# EAGLE board Boost_v3 (EAGLE 8.6.3)
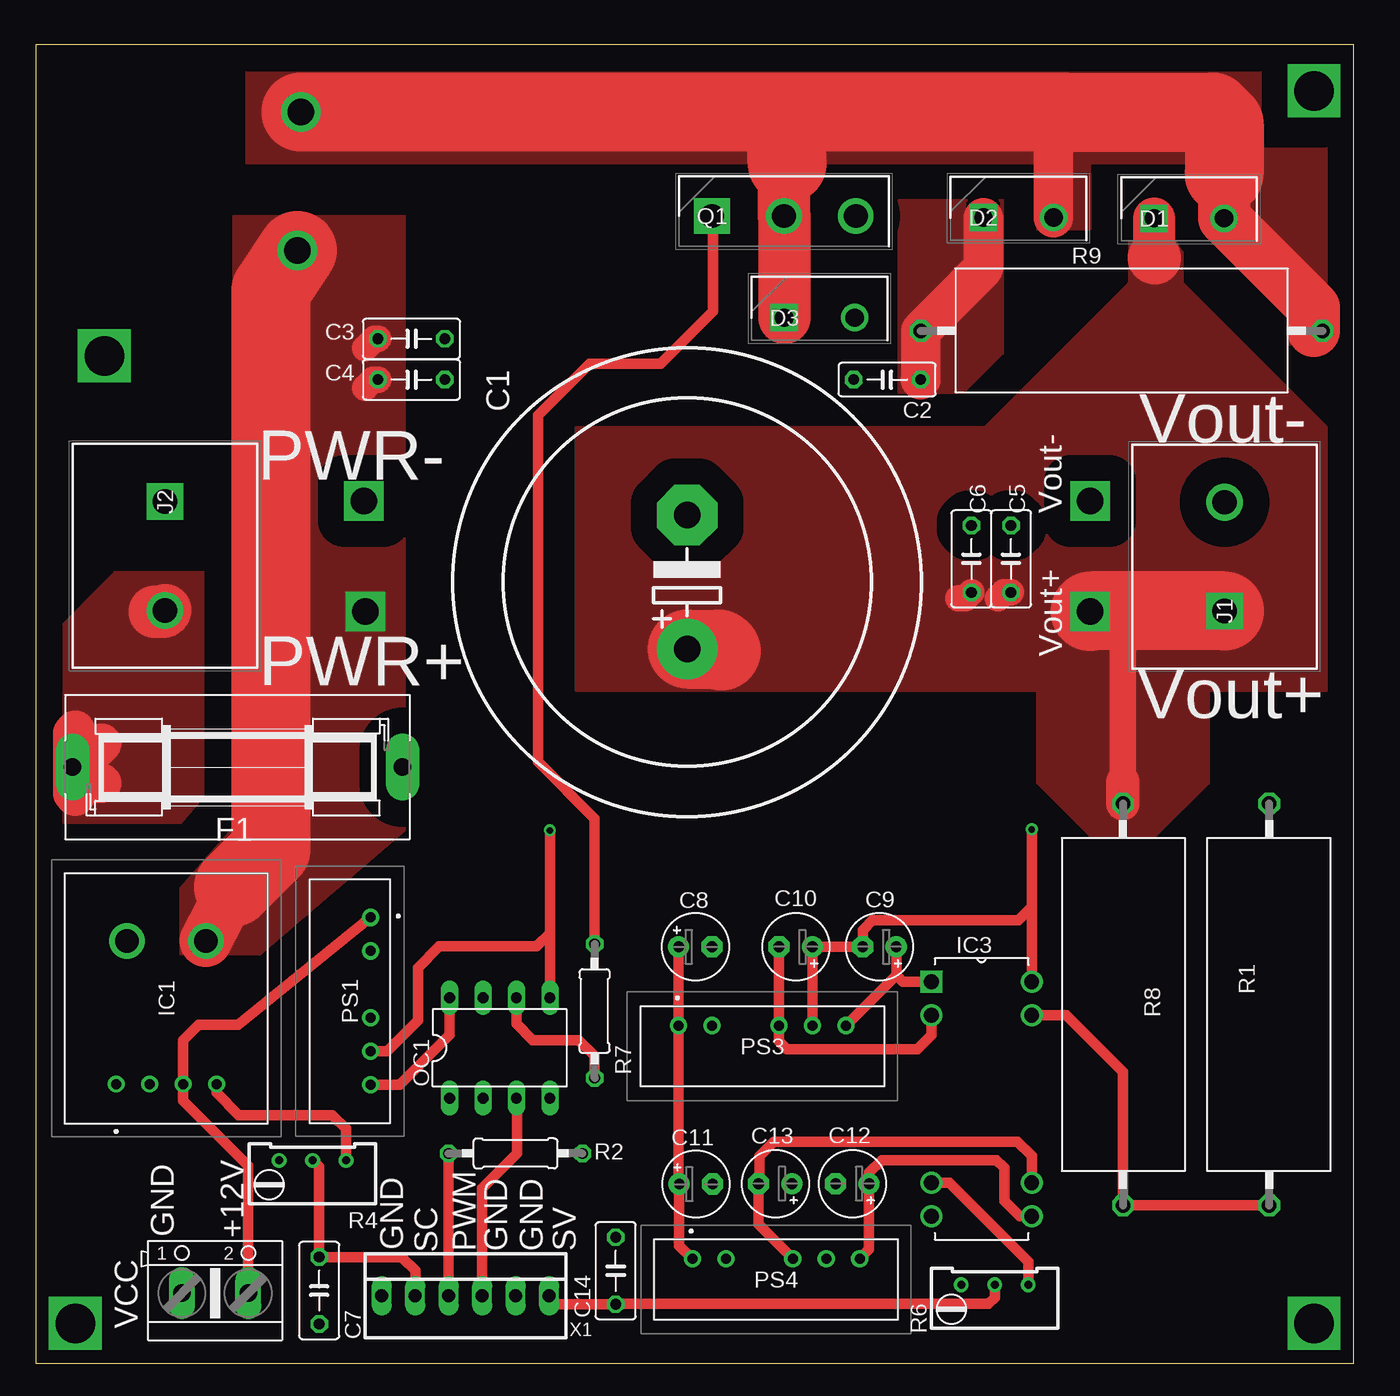
[diagram p0: board, top side]
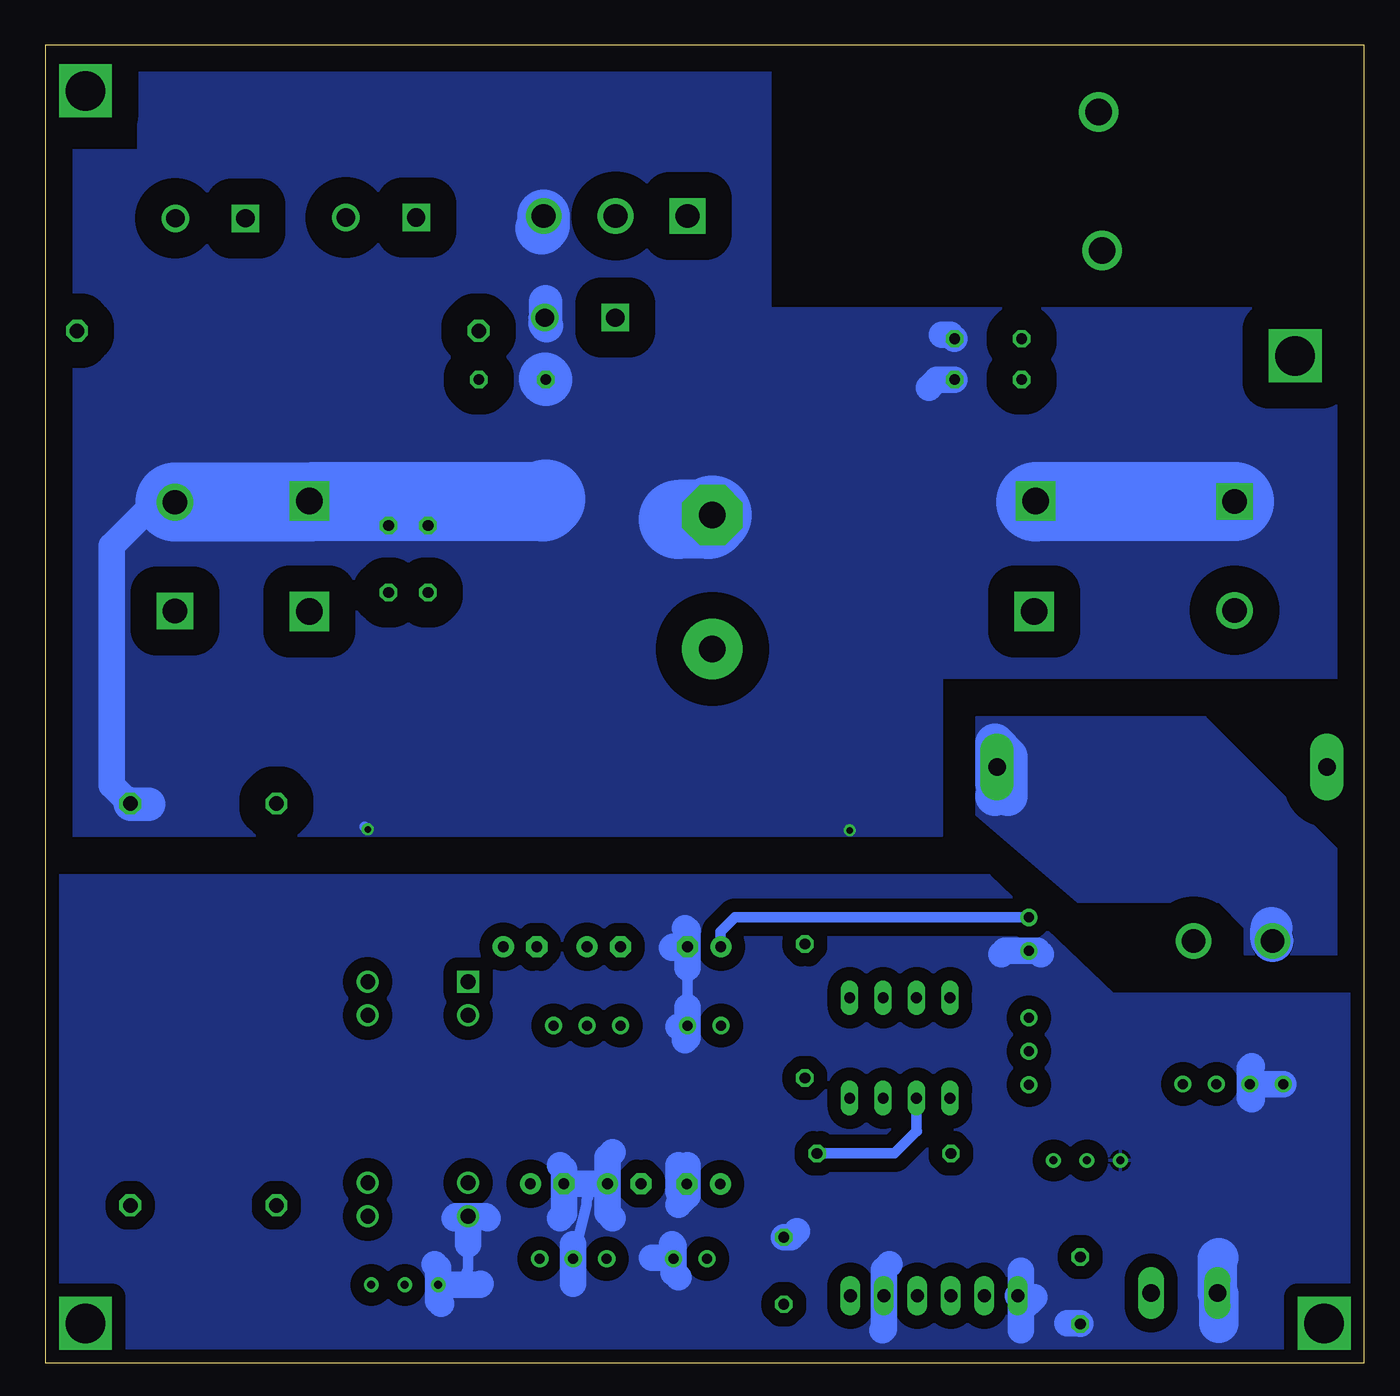
[diagram p1: board, bottom side, seen from below]

Size 100 x 100 mm. Coordinates in mm from the lower left corner, seen from the top.
Outline: 0,0 100,0 100,100 0,100 0,0
Copper layers (1*16): Top 0.035mm / dielectric 1.5mm / Bottom 0.035mm
Design rules "default": minimum track width 6mil, minimum drill 0.35mm, track to track 6mil, track to pad 6mil, pad to pad 6mil, via to via 6mil, smd to smd 6mil, copper to edge 40mil, drill to drill 6mil, minimum pad ring 10mil, minimum via ring 8mil, stop-mask expansion 4mil, vias tented up to drill 0mil, thermal gap 10mil

## Footprints (pad centres in the part's own frame; a part is rotated, then mirrored left to right if it is on the bottom)
EB35D = drill 2.007 pad 4.597: + -5.08,0 | drill 2.007 pad 4.597 octagon: - 5.08,0
C050-025X075 = drill 0.813 octagon: 1 -2.54,0; 2 2.54,0
C050-030X075 = drill 0.813 octagon: 1 -2.54,0; 2 2.54,0
E2,5-5 = drill 0.813 pad 1.6: + -1.27,0 | drill 0.813 pad 1.6 octagon: - 1.27,0
TO533P482X997X1956-2P = drill 1.39 pad 2.085 square: 1 0,0 | drill 1.39 pad 2.085: 2 5.33,0
SH25 = drill 1.321 pad 2.54 long: 1 -12.522,0; 2 12.522,0
HX20P = drill 0.76 pad 1.2: 1 0,0; 2 0,-2.54; 3 0,-5.08; 4 0,-7.62 | drill 1.8 pad 2.7: 5 10.85,-0.81; 6 10.85,-6.81
DIP254P762X533-8P = drill 1.118 pad 1.676 square: 1 -7.62,17.78 | drill 1.118 pad 1.676: 2 -7.62,15.24; 7 -7.62,2.54; 8 -7.62,0; 9 0,0; 10 0,2.54; 15 0,15.24; 16 0,17.78
SHDR2W165P0X825_1X2_1650X1370X = drill 1.85 pad 2.775 square: 1 0,0 | drill 1.85 pad 2.775: 2 8.25,0
DIL08 = drill 0.813 long: 1 -3.81,-3.81; 2 -1.27,-3.81; 3 1.27,-3.81; 4 3.81,-3.81; 5 3.81,3.81; 6 1.27,3.81; 7 -1.27,3.81; 8 -3.81,3.81
DPU01M05 = drill 0.76 pad 1.303: 1 0,0; 2 2.54,0; 4 7.62,0; 5 10.16,0; 6 12.7,0
TO545P530X1560X2460-3P = drill 1.81 pad 2.715 square: 1 0,0 | drill 1.81 pad 2.715: 2 5.45,0; 3 10.9,0
VTA52 = drill 1.1 octagon: 1 -15.24,0; 2 15.24,0
0207/10 = drill 0.813 octagon: 1 -5.08,0; 2 5.08,0
RTRIM64W = drill 0.61: 1 1.27,-2.54; 2 1.27,0; 3 1.27,2.54
AK500/2 = drill 1.321 long: 1 -2.515,0; 2 2.515,0
22-23-2061 = drill 1 long: 1 -6.35,0; 2 -3.81,0; 3 -1.27,0; 4 1.27,0; 5 3.81,0; 6 6.35,0

## Placement (x,y rotation side)
C1  [EB35D]  49.42,59.24 90 top
C2  [C050-025X075]  64.6,74.6 180 top
C3  [C050-030X075]  28.5,77.7 0 top
C4  [C050-030X075]  28.5,74.6 0 top
C5  [C050-030X075]  74,61 90 top
C6  [C050-030X075]  71,61 90 top
C7  [C050-030X075]  21.5,5.5 270 top
C8  1uF  [E2,5-5]  50.05,31.57 0 top
C9  2.2uF  [E2,5-5]  64.02,31.57 180 top
C10  2.2uF  [E2,5-5]  57.67,31.57 180 top
C11  1uF  [E2,5-5]  50.09,13.58 0 top
C12  2.2uF  [E2,5-5]  61.96,13.61 180 top
C13  2.2uF  [E2,5-5]  56.11,13.61 180 top
C14  [C050-030X075]  44,7 90 top
D1  MUR1540G  [TO533P482X997X1956-2P]  84.85,86.84 0 top
D2  MUR1540G  [TO533P482X997X1956-2P]  71.9,86.9 0 top
D3  MUR1540G  [TO533P482X997X1956-2P]  56.8,79.3 0 top
F1  FUSESH35  [SH25]  15.3,45.2 0 top
IC1  HX_20-P  [HX20P]  6.09,21.16 90 top
IC3  ISO124P  [DIP254P762X533-8P]  75.58,11.14 0 top
J1  1977477-2  [SHDR2W165P0X825_1X2_1650X1370X]  90.2,57.05 90 top
J2  1977477-2  [SHDR2W165P0X825_1X2_1650X1370X]  9.8,65.35 270 top
OC1  [DIL08]  35.2,23.9 0 top
PS1  DPU01M-05  [DPU01M05]  25.4,33.8 270 top
PS3  DPU01M-05  [DPU01M05]  48.78,25.6 0 top
PS4  DPU01M-05  [DPU01M05]  49.82,7.91 0 top
Q1  IRFP250NPBF  [TO545P530X1560X2460-3P]  51.32,87.02 0 top
R1  [VTA52]  93.6,27.2 90 top
R2  220  [0207/10]  36.4,15.9 0 top
R4  [RTRIM64W]  21,14.1 90 top
R6  [RTRIM64W]  72.77,4.66 90 top
R7  10  [0207/10]  42.4,26.7 270 top
R8  [VTA52]  82.5,27.2 270 top
R9  [VTA52]  82.4,78.3 0 top
VCC  [AK500/2]  13.6,5.3 0 top
X1  [22-23-2061]  32.6,5.1 0 top

## Library data of the parts
C1-C14 = rcl; SPICEPREFIX: C
D1-D3 = SamacSys_Parts; ALLIED_NUMBER: 70100054; ALLIED_PRICE-STOCK: http://www.alliedelec.com/on-semiconductor-mur1540g/70100054/; HEIGHT: 4.82mm; MANUFACTURER_NAME: ON Semiconductor; MANUFACTURER_PART_NUMBER: MUR1540G; MOUSER_PART_NUMBER: 863-MUR1540G; MOUSER_PRICE-STOCK: https://www.mouser.com/Search/Refine.aspx?Keyword=863-MUR1540G; RS_PART_NUMBER: 5449567P; RS_PRICE-STOCK: http://uk.rs-online.com/web/p/products/5449567P
F1 = fuse; OC_FARNELL: unknown; OC_NEWARK: unknown
IC1 = SamacSys_Parts; DESCRIPTION: SENSOR CURRENT HALL 20A AC/DC; HEIGHT: 20mm; MANUFACTURER_NAME: LEM; MANUFACTURER_PART_NUMBER: HX 20-P
IC3 = ISO124P; DESCRIPTION: Isolating amplifier,ISO124P DIP16 1500V; HEIGHT: mm; MANUFACTURER_NAME: Texas Instruments; MANUFACTURER_PART_NUMBER: ISO124P; MOUSER_PART_NUMBER: 595-ISO124P; MOUSER_PRICE-STOCK: https://www.mouser.com/Search/Refine.aspx?Keyword=595-ISO124P; RS_PART_NUMBER: 3008243P; RS_PRICE-STOCK: http://uk.rs-online.com/web/p/products/3008243P
J1 J2 = SamacSys_Parts; ALLIED_NUMBER: 70248678; ALLIED_PRICE-STOCK: https://www.alliedelec.com/te-connectivity-1977477-2/70248678/; DESCRIPTION: Barrier Terminal Blocks DUAL 2 POS .325 BLK; HEIGHT: 15.1mm; MANUFACTURER_NAME: TE CONNECTIVITY / BUCHANAN; MANUFACTURER_PART_NUMBER: 1977477-2; MOUSER_PART_NUMBER: 571-1977477-2; MOUSER_PRICE-STOCK: https://www.mouser.com/Search/Refine.aspx?Keyword=571-1977477-2
OC1 = optocoupler
PS1 PS3 PS4 = DPU01M-05; DESCRIPTION: Isolated DC/DC Converters 10.8-13.2Vin +/-5V +/-100mA SIP6 Unreg; HEIGHT: 10.45mm; MANUFACTURER_NAME: Mean Well; MANUFACTURER_PART_NUMBER: DPU01M-05; MOUSER_PART_NUMBER: 709-DPU01M-05; MOUSER_PRICE-STOCK: https://www.mouser.com/Search/Refine.aspx?Keyword=709-DPU01M-05
Q1 = SamacSys_Parts; DESCRIPTION: MOSFET N-Channel 200V 30A TO247AC Infineon IRFP250NPBF N-channel MOSFET Transistor, 30 A, 200 V, 3-Pin TO-247AC; HEIGHT: 5.3mm; MANUFACTURER_NAME: Infineon; MANUFACTURER_PART_NUMBER: IRFP250NPBF; MOUSER_PART_NUMBER: 942-IRFP250NPBF; MOUSER_PRICE-STOCK: https://www.mouser.com/Search/Refine.aspx?Keyword=942-IRFP250NPBF
R1 R2 R7-R9 = rcl; SPICEPREFIX: R
R4 R6 = rcl; SPICEMODEL: X; SPICEPREFIXL: POT
VCC = con-ptr500; OC_FARNELL: unknown; OC_NEWARK: unknown
X1 = con-molex; MF: MOLEX; MPN: 22-23-2061; OC_FARNELL: 1462922; OC_NEWARK: 27C1933

## Nets
+12_DIG: C8.+ C11.+ IC1.3 PS1.1 PS3.1 PS4.1 VCC.2
+12_PC: OC1.8 PS1.6
GND_DIG: C7.2 C8.- C11.- C12.- C13.+ C14.2 IC1.1 IC1.2 IC3.8 PS1.2 PS3.2 PS4.2 PS4.5 R4.3 R6.3 VCC.1 X1.1 X1.5
L1: C3.1 C4.1 IC1.6
L2: D1.2 D2.2 D3.1 Q1.2 R9.2
N$1: OC1.2 R2.2
N$2: Q1.1 R7.1
N$3: C7.1 R4.2 X1.2
N$4: C2.1 D2.1 R9.1
N$6: OC1.6 R7.2
N$7: R2.1 X1.3
N$8: OC1.3 X1.4
N$9: C14.1 R6.2 X1.6
N$10: IC1.4 R4.1
N$14: F1.1 J2.2
N$17: C9.+ IC3.1 PS3.6
N$18: C10.- IC3.2 PS3.4
N$19: C12.+ IC3.9 PS4.6
N$20: C13.- IC3.10 PS4.4
N$23: IC3.15 R1.1 R8.2
N$24: IC3.7 R6.1
PWR+: F1.2 IC1.5
PWR-: C1.- C2.2 C3.2 C4.2 C5.2 C6.2 C9.- C10.+ D3.2 IC3.16 J1.2 J2.1 OC1.5 PS1.5 PS3.5 Q1.3 R1.2
VC: C1.+ C5.1 C6.1 D1.1 J1.1 R8.1

## Tracks (layer width: path | path; a pad name or v marks a point on that pad's centre or on a via)
+12_DIG
  Top 0.813: C8.+ PS3.1 48.78,13.62 C11.+ 48.82,8.91 PS4.1 | PS1.1 15.35,25.65 12.35,25.65 11.17,24.47 IC1.3 11.17,19.9 16.11,14.96 VCC.2
  Bottom 0.813: C8.+ 48.8,31.59 48.8,32.7 47.7,33.8 PS1.1
+12_PC
  Top 0.813: OC1.8 31.39,24.91 31.4,24.9 27.6,21.1 PS1.6
GND_DIG
  Bottom 0.813: 51.32,27 51.32,30 | 67.96,9 67.96,7.2 arc90 R6.3 | PS4.5 58.98,12.01 arc90 C13.+
  Bottom 2: C12.- C13.+ | 60,9 59.98,8.98 PS4.5 59.98,6.02 60,6 | PS4.2 52.45,8 54,8 | R6.3 67.07,5.93 67,6 | IC3.8 67.96,9 | 51.36,12.64 C11.- 51.92,13.58 52,13.5 | 51.36,12.64 52,12 | 51.36,12.64 51.32,12.68 51.32,15 | C12.- 60.69,14.69 61,15 | C12.- 60.69,11.31 61,11 | C13.+ 57.38,11.38 57,11 | C13.+ 57.38,15.62 57,16 | 52,13.5 52,13 | 52,13.5 52,15 | IC3.8 68.86,11.14 69,11 | IC3.8 66.64,11.14 66.5,11 | R6.3 70.23,7.23 70.5,7.5 | R6.3 70.23,4.73 70,4.5 | PS4.2 52.36,6.86 52,6.5 | PS4.2 52.36,8.86 52.5,9 | PS3.2 51.42,25.5 52,25.5 | C8.- 52.43,31.57 52.5,31.5 | C8.- 51.32,32.82 51.5,33 | C8.- 51.32,30 | PS3.2 51.32,24.68 51.5,24.5 | PS3.2 51.32,27 | 27.5,31 27.24,31.26 PS1.2 24.76,31.26 24.5,31 | IC1.1 IC1.2 | IC1.2 8.63,20.13 8.5,20 | IC1.2 8.63,22.37 8.5,22.5 | 26,2.5 26,4 25,5 26.15,5 X1.1 26,5.35 26,7 | 36.5,2.5 36.41,2.59 X1.5 36.41,7.09 36,7.5 | C7.2 21.54,3 22.5,3 | C14.2 43.46,9.54 43,10
  Bottom 3: 11,3 11,5.21 VCC.1 11.09,7.92 11,8
  pour Bottom (isolate 1.016): 0,28 0,0 100,0 100,37 28.4,37 19,28
L1  (via drill 2)
  Top 2: C3.1 25.7,77.7 25,77 | C4.1 25.6,74.6 25,74
  Top 3: 15,36.11 15,36.5
  Top 4: IC1.6 15,36.11
  Top 6: v19.85,84.4 17.85,81.4 17.85,38.97 15,36.11
  other vias: 25,57
  pour Top (isolate 2): 11,31 11,36 15,40.6 15,87 28,87 28,40.4 17,31
L2  (via drill 2)
  Top 2: 77.23,94.13 78,94.9
  Top 3: D2.2 77.23,94.13
  Top 4: 26.12,94.9 26.12,94.92 26.2,95 | D3.1 56.8,86.99 Q1.2 56.77,90.77 57,91 | 90.18,90.2 D1.2 96.98,80.04 96.98,78.3
  Top 6: 57,94.9 78,94.9 89.3,94.9 90.18,94.02 90.18,90.2 | 57,94.9 26.12,94.9 v20.1,94.9 | 57,91 57,94.9
  pour Top (isolate 2): 16,98 16,91 93,91 93,98
  pour Top (isolate 2): 77,86 80,86 80,91 76,91 76,86
  pour Top (isolate 2): 95.1,79.6 95.1,77.3 98.6,77.3 98.6,92.1 88.6,92.1 88.6,86.1
N$1
  Bottom 0.813: 33.9,17.6 33.93,17.63 | 33.93,17.63 33.93,17.57 35.6,15.9 R2.2 | OC1.2 33.93,17.63
N$2
  Top 0.813: R7.1 42.4,41.3 38.1,45.6 38.1,71.9 42,75.8 47.4,75.8 51.4,79.8 51.4,86.94 Q1.1
N$3
  Top 0.813: X1.2 28.8,7 27.76,8.04 C7.1 21.5,14.87 R4.2
N$4
  Top 3: D2.1 71.9,83.04 R9.1 67.16,74.62 C2.1
  pour Top (isolate 2): 65.5,73.6 70.4,73.6 73.4,76.6 73.4,88.2 65.5,88.2
N$5  (via drill 3)
  other vias: 5.2,76.4
N$6
  Top 0.813: OC1.6 36.47,25.73 37.7,24.5 41.2,24.5 42.4,23.3 R7.2
N$7
  Top 0.813: X1.3 31.33,13.8 31.32,13.81 R2.1
N$8
  Top 0.813: OC1.3 36.5,20.06 36.5,15.9 33.87,13.27 X1.4
N$9
  Top 0.813: R6.2 72.77,4.97 72.3,4.5 44.04,4.5 C14.1 39.59,4.46 X1.6
N$10
  Top 0.813: R4.1 23.54,17.76 22.5,18.8 15.4,18.8 13.71,20.49 IC1.4
N$11  (via drill 3)
  other vias: 3,3
N$12  (via drill 3)
  other vias: 97,96.5
N$13  (via drill 3)
  other vias: 97,3
N$14
  Top 3: F1.1 2.78,47.78 3,48 | F1.1 3.2,45.2 5,47 | F1.1 2.78,43.22 3,43 | F1.1 3.98,44 5,44
  Top 4: J2.2 9.7,57 9,57
  pour Top (isolate 2): 12.7,60 12.7,43 11,41 1,41 1,55 6,60
N$17
  Top 0.813: C9.+ 65.29,29.41 | 65.29,29.41 PS3.6 | IC3.1 65.78,28.92 65.29,29.41
N$18
  Top 0.813: IC3.2 67.96,24.86 66.9,23.8 57,23.8 56.4,24.4 PS3.4 C10.-
N$19
  Top 0.813: IC3.9 74.66,11.14 73.5,12.3 73.5,14.8 72.9,15.4 64.2,15.4 63.23,14.43 C12.+ 63.23,8.62 PS4.6
N$20
  Top 0.813: IC3.10 75.58,15.72 74.5,16.8 56,16.8 54.9,15.7 54.9,13.66 C13.- 54.84,10.51 PS4.4
N$23
  Top 0.813: R1.1 R8.2 82.5,22.1 78.22,26.38 IC3.15
N$24
  Top 0.813: IC3.7 69.32,13.68 75.31,7.69 R6.1
PWR+
  Bottom 3: 27,43 27,46 28,47 28,44 27.82,44.18 F1.2 27.82,43.18 28,43
  Bottom 3.2: IC1.5 7,32.11 7,33
  pour Bottom (isolate 2): 9,33 9,31 1,31 1,38 12,49 29.4,49 29.4,41.6 21.7,35 11,35
PWR-  (via drill 0.5, 2)
  Top 0.813: PS3.5 C10.+ C9.- 62.75,32.85 63.5,33.6 74.58,33.6 75.58,34.6 | IC3.16 75.58,34.6 | 75.58,34.6 v75.58,40.48 | OC1.5 39.01,32.6 | 39.01,32.6 v39.01,40.39 v39,40.4 | PS1.5 26.64,23.64 29,26 29,30 30.6,31.6 38.01,31.6 39.01,32.6
  Bottom 0.813: v75.58,40.48 75.8,40.7
  Bottom 2: R1.2 95,43.84 95,62 91.7,65.3 J1.2 | C3.2 31.34,78 32,78 | C4.2 32.4,74.6 33,74
  Bottom 2.54: R1.2 93.56,42.4 92.2,42.4 | 62,78.7 62.13,78.83 D3.2 62.1,79.33 62.1,80.5
  Bottom 4: 62.13,74.67 C2.2 | Q1.3 62.22,86.28 62.4,86.1
  Bottom 6: J2.1 24.87,65.35 24.9,65.32 | J1.2 80,65.3 79.98,65.32 62.3,65.32 62.06,65.56 | C1.- 49.74,64 52,64
  other vias: 80,65.4 24.9,65.4
  pour Bottom (isolate 2): 1,52 99,52 99,92 93,92 93,80 1,80
  pour Bottom (isolate 2): 45,80 45,98 93,98 93,80
  pour Bottom (isolate 2): 32,54 32,40 99,40 99,54
VC  (via drill 2)
  Top 2: 82.5,44.1 82.5,55.5 80.95,57.05 80.05,57.05 | C6.1 70.54,58 70,58 | C5.1 73.46,58.46 73,58
  Top 2.54: R8.1 82.5,44.1
  Top 3.2: D1.1 84.85,83.85
  Top 4: 84.85,83.85 84.9,83.8
  Top 6: J1.1 80.05,57.05 v80,57 | C1.+ 51.84,54.16 52,54
  pour Top (isolate 2): 41,71 41,51 99,51 99,70 87,82 87,85 83,85 83,82 72,71
  pour Top (isolate 2): 76,51 76,44 79,41 80,40 85,40 89,44 89,51

## Text on the board
tNames: Vout- | Vout- | PWR- | Vout+ | PWR+ | Vout+ | GND | +12V | GND | SC | PWM | GND | GND | SV